# EAGLE board ProjectSchematic v36 (EAGLE 9.7.0)
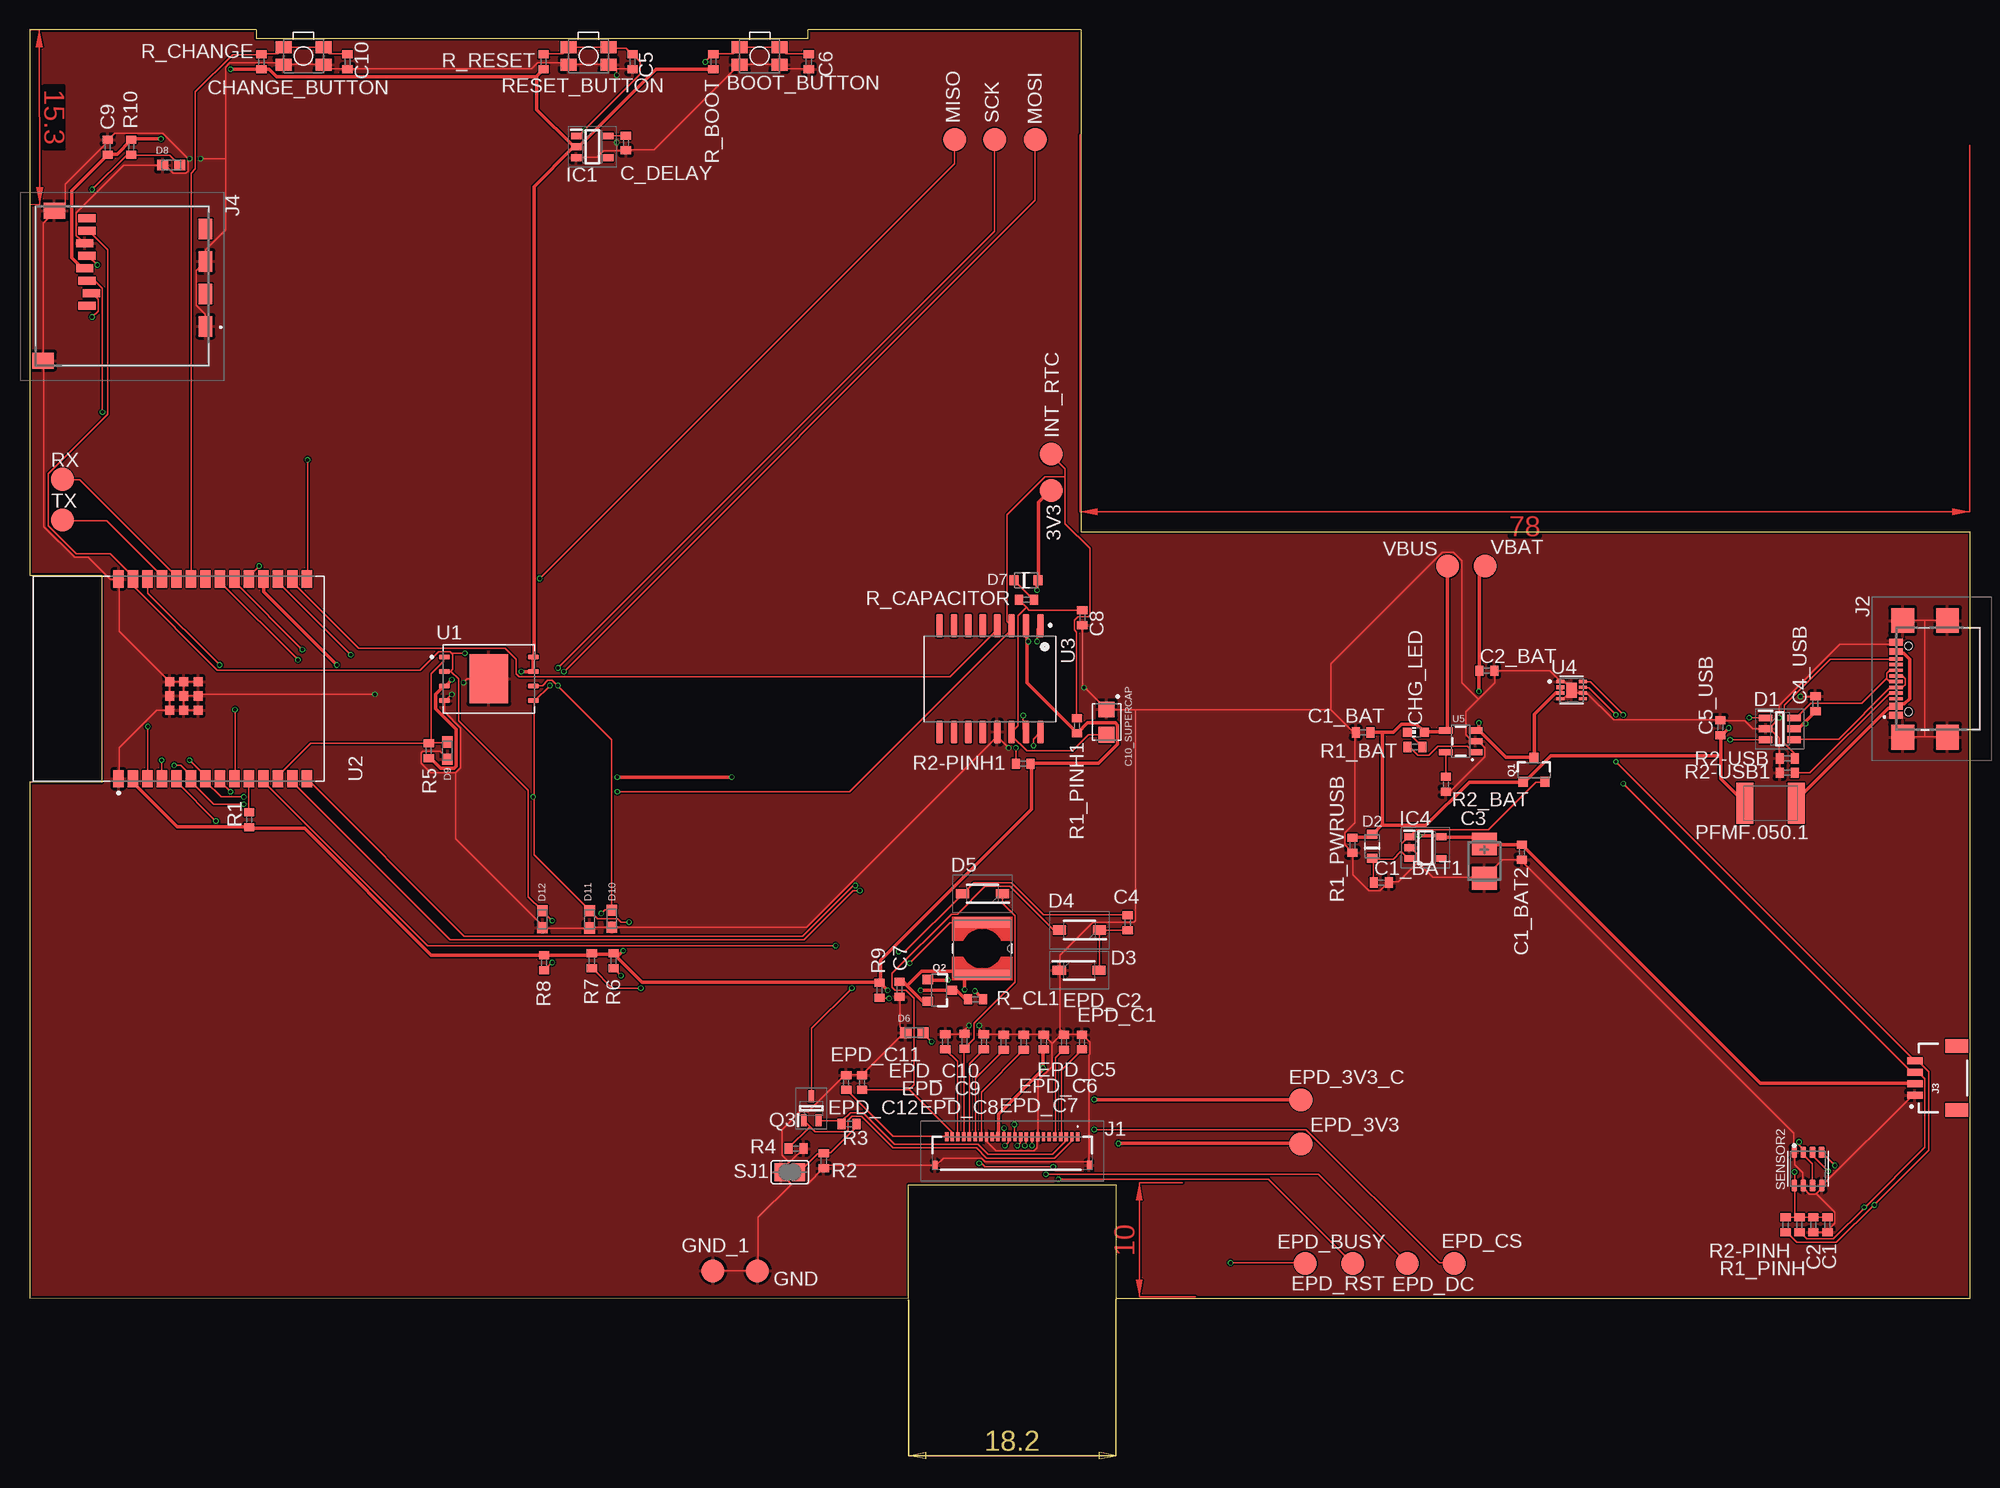
[diagram p0: board, top side]
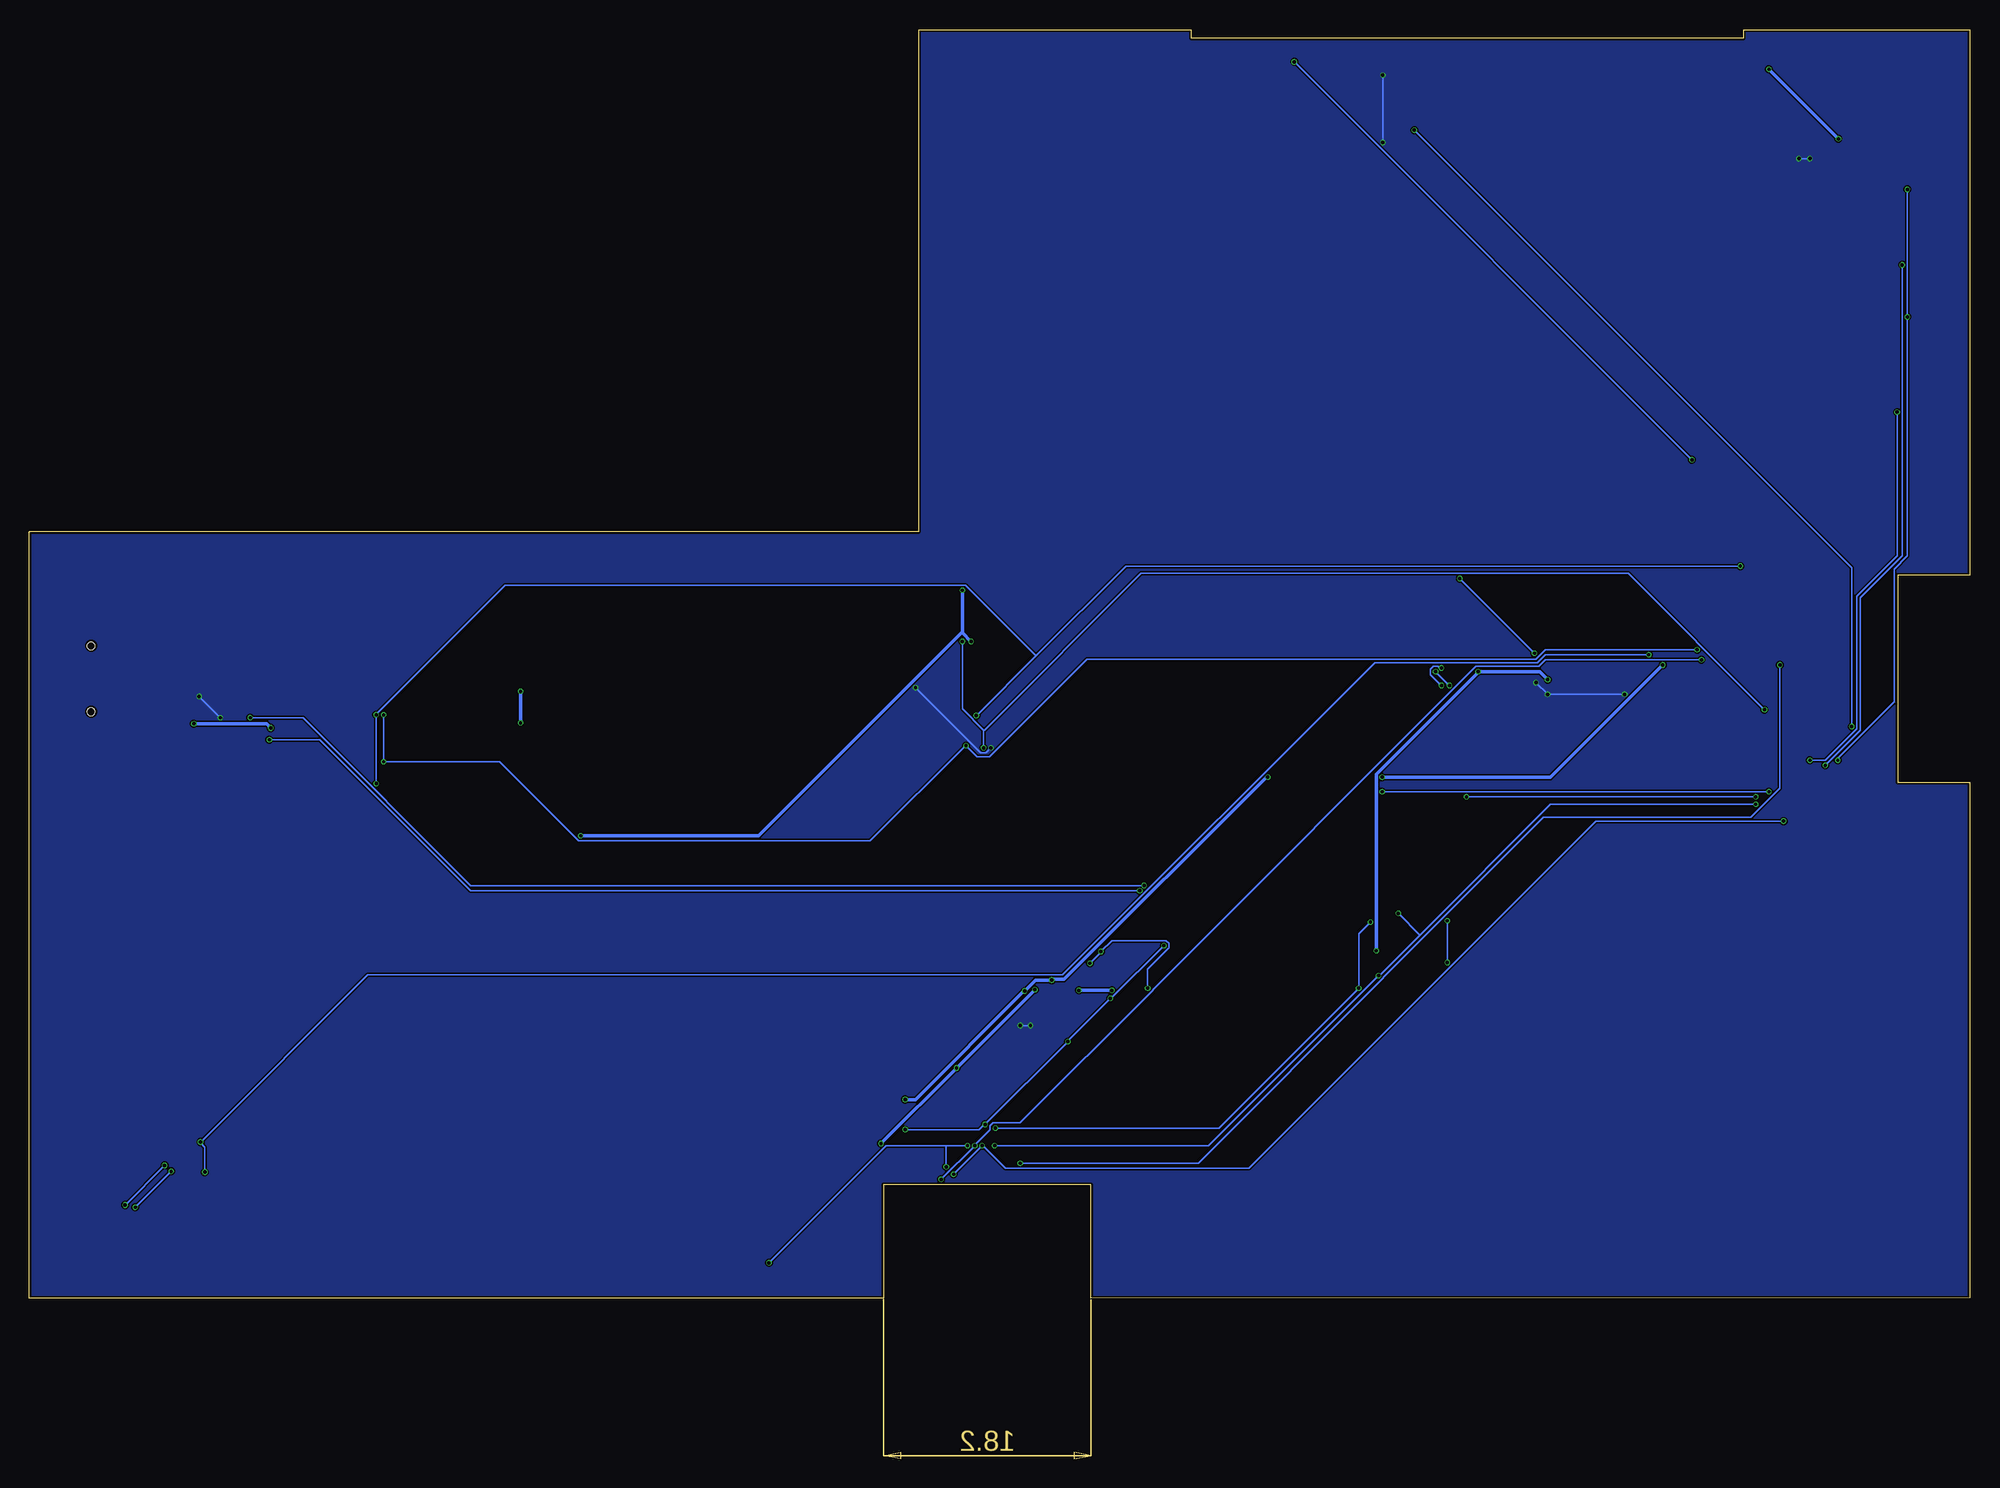
[diagram p1: board, bottom side, seen from below]

Size 170.21 x 111.21 mm. Coordinates in mm from the lower left corner, seen from the top.
Outline: 0,0.02 77.06,0.01 77.07,9.94 95.27,9.96 95.27,0.01 170.21,0 170.21,67.21 92.21,67.21 92.21,111.21 68.26,111.21 68.26,110.46 19.84,110.46 19.84,111.21 0.01,111.21 0.01,63.38 6.3,63.38 6.3,45.24 0.01,45.24 0,0.02
Copper layers (1*16): Top 0.035mm / dielectric 1.6mm / Bottom 0.035mm
Design rules "jlcpcb-2layers.dru": minimum track width 0.13mm, minimum drill 0.3mm, track to track 5mil, track to pad 5mil, pad to pad 5mil, via to via 5mil, smd to smd 5mil, copper to edge 0.2mm, drill to drill 6mil, minimum pad ring 10mil, minimum via ring 3mil, stop-mask expansion 4mil, vias tented up to drill 0mil, thermal gap 10mil
Net classes: 1 pow: width 0.3 mm; 2 rst: width 0.15 mm

## Footprints (pad centres in the part's own frame; a part is rotated, then mirrored left to right if it is on the bottom)
TP20R = smd 2 x 2: TP 0,0
MYBUTTON = smd 1.4 x 1.05: 1 1.75,0.75; 2 -1.75,0.75; 3 -1.75,-0.75; 4 1.75,-0.75
ESP32_WROVER_EAGLE-LTSPICE_C0402 = smd 0.7 x 0.9: 1 -0.65,0; 2 0.65,0
RCL_CT3528 = smd 2 x 2.2: + -1.5,0; - 1.5,0
CAPCP3225X100N = smd 1.4 x 1.4: 1 -1.1,0; 2 1.1,0
ADAFRUIT_CHIP-LED0603 = smd 0.8 x 0.8: A 0,-0.75; C 0,0.75
SOT95P280X145-6N = smd 1.2 x 0.6: 1 -1.25,0.95; 2 -1.25,0; 3 -1.25,-0.95; 4 1.25,-0.95; 5 1.25,0; 6 1.25,0.95
ESP32_WROVER_AVX---SD0805S020S1R0_AVX_SD0805S020S1R0_0 = smd 0.8 x 0.9: 1 -1.05,0; 2 1.05,0
SOD3716X135N = smd 1.15 x 0.8: 1 -1.75,0; 2 1.75,0
DIOC1608X36N = smd 0.97 x 0.94: 1 -0.75,0; 2 0.75,0
SOT95P280X125-5N = smd 0.9 x 0.6: 1 -1.4,0.95; 2 -1.4,0; 3 -1.4,-0.95; 4 1.4,-0.95; 5 1.4,0.95
SOT95P280X120-5N = smd 0.9 x 0.6: 1 -1.4,0.95; 2 -1.4,0; 3 -1.4,-0.95; 4 1.4,-0.95; 5 1.4,0.95
FH34SRJ24S05SH99 = smd 0.3 x 0.8: 1 5.75,1.45; 2 5.25,1.45; 3 4.75,1.45; 4 4.25,1.45; 5 3.75,1.45; 6 3.25,1.45; 7 2.75,1.45; 8 2.25,1.45; 9 1.75,1.45; 10 1.25,1.45; 11 0.75,1.45; 12 0.25,1.45; 13 -0.25,1.45; 14 -0.75,1.45; 15 -1.25,1.45; 16 -1.75,1.45; 17 -2.25,1.45; 18 -2.75,1.45; 19 -3.25,1.45; 20 -3.75,1.45; 21 -4.25,1.45; 22 -4.75,1.45; 23 -5.25,1.45; 24 -5.75,1.45 | smd 0.4 x 0.8: MP1 6.75,-1.05; MP2 -6.75,-1.05
SAMACSYS_PARTS_USB4110GFA = smd 0.3 x 1.15: A1 -3.35,3.678; A4 -2.55,3.678; A5 -1.25,3.678; A6 -0.25,3.678; A7 0.25,3.678; A8 1.25,3.678; A9 2.55,3.678; A12 3.35,3.678; B1 3.05,3.678; B4 2.25,3.678; B5 1.75,3.678; B6 0.75,3.678; B7 -0.75,3.678; B8 -1.75,3.678; B9 -2.25,3.678; B12 -3.05,3.678 | smd 2.18 x 2: MP1 -5.11,-0.827; MP2 5.11,-0.827; MP3 -5.11,3.103; MP4 5.11,3.103 | hole 0.65: -2.89,2.603; 2.89,2.603
JST04_1MM_RA = smd 0.6 x 1.35: 1 -1.5,0; 2 -0.5,0; 3 0.5,0; 4 1.5,0 | smd 1.2 x 2: NC1 2.8,-3.675; NC2 -2.8,-3.675
112ATAARR03ATTEND = smd 1.8 x 1.2: G1 10.6,10.4; G2 4.9,10.4; S1 7.75,10.4; S2 2.05,10.4 | smd 1.4 x 1.9: G3 13.6,-3.85; G4 0.45,-2.85 | smd 0.7 x 1.5: P1 8.8,0; P2 7.7,0.4; P3 6.6,0; P4 5.5,-0.2; P5 4.4,0; P6 3.3,-0.2; P7 2.2,0; P8 1.1,0
IND_4828-WE-TPC_WRE = smd 0.889 x 4.826: 1 -2.286,0; 2 2.286,0
ESP32C6_VARISTOR_CT/CN1812 = smd 1.5 x 3.6: 1 -2.25,0; 2 2.25,0
ESP32_WROVER_SPARKFUN-DISCRETESEMI_SOT23-3 = smd 0.8 x 0.9: 1 -0.95,-1; 2 0.95,-1; 3 0,1.1
SOT65P210X110-3N = smd 1.05 x 0.5: 1 -1.05,0.65; 2 -1.05,-0.65; 3 1.05,0
ESP32_WROVER_EAGLE-LTSPICE_R0402 = smd 0.7 x 0.9: 1 -0.65,0; 2 0.65,0
ESP32_WROVER_BME680_PSON80P300X300X100-8N = smd 1.016 x 0.5: 1 1.458,1.2; 2 1.458,0.4; 3 1.458,-0.4; 4 1.458,-1.2; 5 -1.458,-1.22; 6 -1.458,-0.4; 7 -1.458,0.4; 8 -1.458,1.2
SJ = smd 1.168 x 1.6: 1 -0.762,0; 2 0.762,0
SON127P600X800X80-9N = smd 0.94 x 0.44: 1 -3.895,1.905; 2 -3.895,0.635; 3 -3.895,-0.635; 4 -3.895,-1.905; 5 3.895,-1.905; 6 3.895,-0.635; 7 3.895,0.635; 8 3.895,1.905 | smd 3.4 x 4.3: 9 0,0
XCVR_ESP32-C6-WROOM-1-N8 = smd 1.5 x 0.9: 1 -8.75,5.26; 2 -8.75,3.99; 3 -8.75,2.72; 4 -8.75,1.45; 5 -8.75,0.18; 6 -8.75,-1.09; 7 -8.75,-2.36; 8 -8.75,-3.63; 9 -8.75,-4.9; 10 -8.75,-6.17; 11 -8.75,-7.44; 12 -8.75,-8.71; 13 -8.75,-9.98; 14 -8.75,-11.25; 15 8.75,-11.25; 16 8.75,-9.98; 17 8.75,-8.71; 18 8.75,-7.44; 19 8.75,-6.17; 20 8.75,-4.9; 21 8.75,-3.63; 22 8.75,-2.36; 23 8.75,-1.09; 24 8.75,0.18; 25 8.75,1.45; 26 8.75,2.72; 27 8.75,3.99; 28 8.75,5.26 | smd 0.8 x 0.8: 29_1 -2.755,0.79; 29_2 -1.505,0.79; 29_3 -0.255,0.79; 29_4 -2.755,-0.46; 29_5 -1.505,-0.46; 29_6 -0.255,-0.46; 29_7 -2.755,-1.71; 29_8 -1.505,-1.71; 29_9 -0.255,-1.71
SOIC127P1032X265-16N = smd 2.05 x 0.59: 1 -4.655,4.445; 2 -4.655,3.175; 3 -4.655,1.905; 4 -4.655,0.635; 5 -4.655,-0.635; 6 -4.655,-1.905; 7 -4.655,-3.175; 8 -4.655,-4.445; 9 4.655,-4.445; 10 4.655,-3.175; 11 4.655,-1.905; 12 4.655,-0.635; 13 4.655,0.635; 14 4.655,1.905; 15 4.655,3.175; 16 4.655,4.445
SON50P200X200X80-9N = smd 0.76 x 0.27: 1 -0.985,0.75; 4 -0.985,-0.75; 5 0.985,-0.75; 6 0.985,-0.25; 7 0.985,0.25; 8 0.985,0.75 | smd 0.76 x 0.3: 2 -0.985,0.25; 3 -0.985,-0.25 | smd 0.9 x 1.3: 9 0,0
ESP32_WROVER_SPARKFUN-IC-POWER_SOT23-5 = smd 0.55 x 1.2: 1 -0.95,-1.3; 2 0,-1.3; 3 0.95,-1.3; 4 0.95,1.3; 5 -0.95,1.3

## Placement (x,y rotation side)
3V3  TPTP20R  [TP20R]  89.57,70.82 0 top
BOOT_BUTTON  BUTTON_CUSYOMV1  [MYBUTTON]  64.01,108.92 180 top
C1  100nF  [ESP32_WROVER_EAGLE-LTSPICE_C0402]  157.67,6.43 270 top
C1_BAT  4.7uF  [ESP32_WROVER_EAGLE-LTSPICE_C0402]  116.95,49.61 180 top
C1_BAT1  4.7uF  [ESP32_WROVER_EAGLE-LTSPICE_C0402]  118.54,36.44 0 top
C1_BAT2  4.7uF  [ESP32_WROVER_EAGLE-LTSPICE_C0402]  130.86,39.1 270 top
C2  100nF  [ESP32_WROVER_EAGLE-LTSPICE_C0402]  156.43,6.43 270 top
C2_BAT  4.7uF  [ESP32_WROVER_EAGLE-LTSPICE_C0402]  127.8,55.02 0 top
C3  100uF TANT  [RCL_CT3528]  127.58,38.33 270 top
C4  4.7uF/25V  [ESP32_WROVER_EAGLE-LTSPICE_C0402]  96.3,32.91 90 top
C4_USB  100nF  [ESP32_WROVER_EAGLE-LTSPICE_C0402]  156.62,52.12 90 top
C5  1uF  [ESP32_WROVER_EAGLE-LTSPICE_C0402]  52.87,108.42 270 top
C5_USB  4.7uF  [ESP32_WROVER_EAGLE-LTSPICE_C0402]  148.28,50.03 90 top
C6  100nF  [ESP32_WROVER_EAGLE-LTSPICE_C0402]  68.33,108.42 270 top
C7  10uF  [ESP32_WROVER_EAGLE-LTSPICE_C0402]  76.29,27.08 270 top
C8  100nF  [ESP32_WROVER_EAGLE-LTSPICE_C0402]  92.32,59.67 270 top
C9  100nF  [ESP32_WROVER_EAGLE-LTSPICE_C0402]  6.84,100.93 90 top
C10  100nF  [ESP32_WROVER_EAGLE-LTSPICE_C0402]  27.87,108.42 270 top
C10_SUPERCAP  CPH3225A  [CAPCP3225X100N]  94.44,50.52 270 top
C_DELAY  100nF  [ESP32_WROVER_EAGLE-LTSPICE_C0402]  52.29,101.29 270 top
CHANGE_BUTTON  BUTTON_CUSYOMV1  [MYBUTTON]  24.01,108.92 180 top
CHG_LED  [ADAFRUIT_CHIP-LED0603]  121.57,49.63 90 top
D1  USBLC6-2SC6Y  [SOT95P280X145-6N]  153.5,49.93 0 top
D2  ESP32_WROVER_AVX---SD0805S020S1R0_AVX_SD0805S020S1R0_0_0AVX_SD0805S020S1R0_0_0  [ESP32_WROVER_AVX---SD0805S020S1R0_AVX_SD0805S020S1R0_0]  117.74,39.62 90 top
D3  MBR0530  [SOD3716X135N]  92.04,28.74 0 top
D4  MBR0530  [SOD3716X135N]  92.07,32.28 180 top
D5  MBR0530  [SOD3716X135N]  83.57,35.46 180 top
D6  PGB1010603MR  [DIOC1608X36N]  77.58,23.28 0 top
D7  ESP32_WROVER_AVX---SD0805S020S1R0_AVX_SD0805S020S1R0_0_0AVX_SD0805S020S1R0_0_0  [ESP32_WROVER_AVX---SD0805S020S1R0_AVX_SD0805S020S1R0_0]  87.38,62.95 0 top
D8  PGB1010603MR  [DIOC1608X36N]  12.4,99.36 0 top
D9  PGB1010603MR  [DIOC1608X36N]  36.64,48.02 90 top
D10  PGB1010603MR  [DIOC1608X36N]  51.06,33.26 90 top
D11  PGB1010603MR  [DIOC1608X36N]  49.1,33.21 90 top
D12  PGB1010603MR  [DIOC1608X36N]  44.96,33.22 90 top
EPD_3V3  TPTP20R  [TP20R]  111.49,13.53 0 top
EPD_3V3_C  TPTP20R  [TP20R]  111.49,17.38 0 top
EPD_BUSY  TPTP20R  [TP20R]  111.87,3.06 0 top
EPD_C1  1uF/50V  [ESP32_WROVER_EAGLE-LTSPICE_C0402]  92.28,22.47 90 top
EPD_C2  1uF/50V  [ESP32_WROVER_EAGLE-LTSPICE_C0402]  90.71,22.45 90 top
EPD_C5  0.1uF/50V  [ESP32_WROVER_EAGLE-LTSPICE_C0402]  88.93,22.47 270 top
EPD_C6  1uF/50V  [ESP32_WROVER_EAGLE-LTSPICE_C0402]  87.18,22.44 270 top
EPD_C7  1uF/50V  [ESP32_WROVER_EAGLE-LTSPICE_C0402]  85.42,22.44 270 top
EPD_C8  1uF/50V  [ESP32_WROVER_EAGLE-LTSPICE_C0402]  83.68,22.49 270 top
EPD_C9  1uF/50V  [ESP32_WROVER_EAGLE-LTSPICE_C0402]  81.99,22.52 270 top
EPD_C10  1uF/50V  [ESP32_WROVER_EAGLE-LTSPICE_C0402]  80.3,22.49 270 top
EPD_C11  1uF/50V  [ESP32_WROVER_EAGLE-LTSPICE_C0402]  72.99,18.92 270 top
EPD_C12  1uF/50V  [ESP32_WROVER_EAGLE-LTSPICE_C0402]  71.61,18.92 270 top
EPD_CS  TPTP20R  [TP20R]  124.93,3.06 0 top
EPD_DC  TPTP20R  [TP20R]  120.82,3.06 0 top
EPD_RST  TPTP20R  [TP20R]  116.04,3.06 0 top
GND  TPTP20R  [TP20R]  63.83,2.39 0 top
GND_1  TPTP20R  [TP20R]  59.92,2.39 0 top
IC1  BD5229G-TR  [SOT95P280X125-5N]  49.34,100.96 0 top
IC4  XC6220A331MR-G  [SOT95P280X120-5N]  122.4,39.5 0 top
INT_RTC  TPTP20R  [TP20R]  89.57,74.02 0 top
J1  FH34SRJ-24S-0.5SH_99_  [FH34SRJ24S05SH99]  86.16,12.7 0 top
J2  SAMACSYS_PARTS_USB4110-GF-A  [SAMACSYS_PARTS_USB4110GFA]  167.37,54.31 90 top
J3  QWIIC_RIGHT_ANGLE  [JST04_1MM_RA]  165.33,19.31 90 top
J4  112A-TAAR-R03_ATTEND  [112ATAARR03ATTEND]  5.02,95.81 270 top
L1  68uH  [IND_4828-WE-TPC_WRE]  83.54,30.66 270 top
MISO  TPTP20R  [TP20R]  81.11,101.6 90 top
MOSI  TPTP20R  [TP20R]  88.19,101.6 90 top
PFMF.050.1  ESP32C6_VARISTORCN1812  [ESP32C6_VARISTOR_CT/CN1812]  152.68,43.4 180 top
Q1  20V/4.2A/52mΩ/1.4W  [ESP32_WROVER_SPARKFUN-DISCRETESEMI_SOT23-3]  131.93,46.29 0 top
Q2  20V/4.2A/52mΩ/1.4W  [ESP32_WROVER_SPARKFUN-DISCRETESEMI_SOT23-3]  79.76,27 270 top
Q3  SI1308EDL-T1-GE3  [SOT65P210X110-3N]  68.54,16.64 90 top
R1  10K  [ESP32_WROVER_EAGLE-LTSPICE_R0402]  19.25,41.96 90 top
R1_BAT  200  [ESP32_WROVER_EAGLE-LTSPICE_R0402]  121.49,48.33 0 top
R1_PINH  10K  [ESP32_WROVER_EAGLE-LTSPICE_R0402]  155.22,6.43 90 top
R1_PINH1  10K  [ESP32_WROVER_EAGLE-LTSPICE_R0402]  91.84,50.19 270 top
R1_PWRUSB  100K  [ESP32_WROVER_EAGLE-LTSPICE_R0402]  116,39.72 90 top
R2  2.2  [ESP32_WROVER_EAGLE-LTSPICE_R0402]  69.64,12.05 90 top
R2-PINH  10K  [ESP32_WROVER_EAGLE-LTSPICE_R0402]  154,6.43 90 top
R2-PINH1  10K  [ESP32_WROVER_EAGLE-LTSPICE_R0402]  87.14,46.87 0 top
R2-USB  5k1  [ESP32_WROVER_EAGLE-LTSPICE_R0402]  154.15,47.33 180 top
R2-USB1  5K1  [ESP32_WROVER_EAGLE-LTSPICE_R0402]  154.14,46.07 0 top
R2_BAT  2K  [ESP32_WROVER_EAGLE-LTSPICE_R0402]  124.2,45.06 90 top
R3  0.47  [ESP32_WROVER_EAGLE-LTSPICE_R0402]  71.87,15.27 0 top
R4  10K  [ESP32_WROVER_EAGLE-LTSPICE_R0402]  67.21,13.12 0 top
R5  10K  [ESP32_WROVER_EAGLE-LTSPICE_R0402]  35,48.01 270 top
R6  10K  [ESP32_WROVER_EAGLE-LTSPICE_R0402]  51.2,29.59 90 top
R7  10K  [ESP32_WROVER_EAGLE-LTSPICE_R0402]  49.3,29.59 90 top
R8  10K  [ESP32_WROVER_EAGLE-LTSPICE_R0402]  45.12,29.41 90 top
R9  10K  [ESP32_WROVER_EAGLE-LTSPICE_R0402]  74.54,27 90 top
R10  10K  [ESP32_WROVER_EAGLE-LTSPICE_R0402]  8.89,100.93 90 top
R_BOOT  10K  [ESP32_WROVER_EAGLE-LTSPICE_R0402]  59.96,108.42 90 top
R_CAPACITOR  15  [ESP32_WROVER_EAGLE-LTSPICE_R0402]  87.42,61.24 0 top
R_CHANGE  10K  [ESP32_WROVER_EAGLE-LTSPICE_R0402]  20.32,108.42 90 top
R_CL1  10K  [ESP32_WROVER_EAGLE-LTSPICE_R0402]  82.95,26.22 0 top
R_RESET  10K  [ESP32_WROVER_EAGLE-LTSPICE_R0402]  45.06,108.42 90 top
RESET_BUTTON  BUTTON_CUSYOMV1  [MYBUTTON]  49.01,108.92 180 top
RX  TPTP20R  [TP20R]  2.86,71.81 0 top
SCK  TPTP20R  [TP20R]  84.63,101.6 90 top
SENSOR2  BME688  [ESP32_WROVER_BME680_PSON80P300X300X100-8N]  155.96,11.34 90 top
SJ1  [SJ]  66.67,11.05 0 top
TX  TPTP20R  [TP20R]  2.86,68.22 0 top
U1  W25Q512JVEIQ  [SON127P600X800X80-9N]  40.26,54.31 0 top
U2  ESP32-C6-WROOM-1-N8  [XCVR_ESP32-C6-WROOM-1-N8]  13.05,54.31 90 top
U3  DS3231SN#  [SOIC127P1032X265-16N]  84.22,54.31 270 top
U4  MAX17048G+T10  [SON50P200X200X80-9N]  135.23,53.32 0 top
U5  MCP73831  [ESP32_WROVER_SPARKFUN-IC-POWER_SOT23-5]  125.5,48.83 90 top
VBAT  TPTP20R  [TP20R]  127.64,64.2 0 top
VBUS  TPTP20R  [TP20R]  124.37,64.19 0 top

## Library data of the parts
3V3 BOOT_BUTTON CHANGE_BUTTON CHG_LED EPD_3V3 EPD_3V3_C EPD_BUSY EPD_CS EPD_DC EPD_RST GND GND_1 INT_RTC MISO MOSI PFMF.050.1 RESET_BUTTON RX SCK SJ1 TX VBAT VBUS = ProjectLib
C1 C1_BAT C1_BAT1 C1_BAT2 C2 C2_BAT C4 C4_USB C5 C5_USB C6-C10 C_DELAY EPD_C1 EPD_C2 EPD_C5-EPD_C12 = ProjectLib; SPICEMODEL: NONE; SPICEPREFIX: C
C3 = ProjectLib; SPICEPREFIX: C
C10_SUPERCAP = ProjectLib; AVAILABILITY: Not in stock; CHECK_PRICES: https://www.snapeda.com/parts/CPH3225A/Seiko+Instruments/view-part/?ref=eda; DESCRIPTION: 11 mF (EDLC) Supercapacitor 3.3 V 1210 (3225 Metric) - -; MF: Seiko Instruments; MP: CPH3225A; PACKAGE: 1210 Seiko; PRICE: None; PURCHASE-URL: https://www.snapeda.com/api/url_track_click_mouser/?unipart_id=562593&manufacturer=Seiko Instruments&part_name=CPH3225A&search_term=None; SNAPEDA_LINK: https://www.snapeda.com/parts/CPH3225A/Seiko+Instruments/view-part/?ref=snap
D1 = ProjectLib; AVAILABILITY: In Stock; CHECK_PRICES: https://www.snapeda.com/parts/USBLC6-2SC6Y/STMicroelectronics/view-part/?ref=eda; DESCRIPTION: 17V Clamp 5A (8/20µs) Ipp Tvs Diode Surface Mount SOT-23-6; MF: STMicroelectronics; MP: USBLC6-2SC6Y; PACKAGE: SOT-23-6 STMicroelectronics; PRICE: None; SNAPEDA_LINK: https://www.snapeda.com/parts/USBLC6-2SC6Y/STMicroelectronics/view-part/?ref=snap
D2 D7 = ProjectLib; CENTROID_NOT_SPECIFIED: No; DATASHEET: http://datasheets.avx.com/schottky.pdf; DIGIKEY_DESCRIPTION: DIODE SCHOTTKY 20V 1A 0805; DIGIKEY_PART_NUMBER: 478-7800-1-ND; LEAD_FREE: yes; MF: AVX; MOUSER_PART_NUMBER: 581-SD0805S020S1R0; PACKAGE: 0805 (2012 metric); PREFIX: D; ROHS: yes; TEMPERATURE_RANGE_HIGH: +125°C; TEMPERATURE_RANGE_LOW: -55°C
D3-D5 = ProjectLib; AVAILABILITY: In Stock; CHECK_PRICES: https://www.snapeda.com/parts/MBR0530/Onsemi/view-part/?ref=eda; DESCRIPTION: Diode Schottky 30 V 500mA Surface Mount SOD-123; MF: ON Semiconductor; MP: MBR0530; PACKAGE: SOD-123-2 ON Semiconductor; PRICE: None; PURCHASE-URL: https://www.snapeda.com/api/url_track_click_mouser/?unipart_id=179458&manufacturer=ON Semiconductor&part_name=MBR0530&search_term=None; SNAPEDA_LINK: https://www.snapeda.com/parts/MBR0530/Onsemi/view-part/?ref=snap
D6 D8-D12 = ProjectLib; AVAILABILITY: In Stock; CHECK_PRICES: https://www.snapeda.com/parts/PGB1010603MR/Littelfuse/view-part/?ref=eda; DESCRIPTION: 150V (Typ) Clamp - Ipp Tvs Diode Surface Mount 0603 (1608 Metric); MF: Littelfuse Inc.; MP: PGB1010603MR; PACKAGE: 0603 Littelfuse Inc.; PRICE: None; PURCHASE-URL: https://www.snapeda.com/api/url_track_click_mouser/?unipart_id=5659453&manufacturer=Littelfuse Inc.&part_name=PGB1010603MR&search_term=None; SNAPEDA_LINK: https://www.snapeda.com/parts/PGB1010603MR/Littelfuse/view-part/?ref=snap
IC1 = ProjectLib; DESCRIPTION: Voltage Detector with Adjustable Delay Time: CMOS processes are utilized to develop high precision, low current consumption CMOS reset ICs that allow arbitrary setting of the delay time. The extensive lineup includes both Nch Open Drain and CMOS output types in a wide range of detection voltages (from 2.3V to 6.0V, in 0.1V steps), enabling selection of the ideal solution based on customer requirements. In addition, the entire series is of course both lead-free and RoHS-compliant.; HEIGHT: 1.25mm; MANUFACTURER_NAME: ROHM Semiconductor; MANUFACTURER_PART_NUMBER: BD5229G-TR; MOUSER_PART_NUMBER: 755-BD5229G-TR; MOUSER_PRICE-STOCK: https://www.mouser.co.uk/ProductDetail/ROHM-Semiconductor/BD5229G-TR?qs=4kLU8WoGk0vvnhrrYwdszw%3D%3D
IC4 = ProjectLib; DESCRIPTION: LDO Voltage Regulators; HEIGHT: 1.2mm; MANUFACTURER_NAME: Torex; MANUFACTURER_PART_NUMBER: XC6220A331MR-G; MOUSER_PART_NUMBER: 865-XC6220A331MR-G; MOUSER_PRICE-STOCK: https://www.mouser.co.uk/ProductDetail/Torex-Semiconductor/XC6220A331MR-G?qs=AsjdqWjXhJ8ZSWznL1J0gg%3D%3D
J1 = ProjectLib; DESCRIPTION: 24 Position FFC, FPC Connector Contacts, Top and Bottom 0.020" (0.50mm) Surface Mount, Right Angle; HEIGHT: 1.1mm; MANUFACTURER_NAME: Hirose; MANUFACTURER_PART_NUMBER: FH34SRJ-24S-0.5SH(99); MOUSER_PART_NUMBER: 798-FH34SRJ24S05SH99; MOUSER_PRICE-STOCK: https://www.mouser.co.uk/ProductDetail/Hirose-Connector/FH34SRJ-24S-0.5SH99?qs=vcbW%252B4%252BSTIpKBl5ap9J8Fw%3D%3D
J2 = ProjectLib; DESCRIPTION: CONN USB 2.0 TYPE-C R/A SMT; HEIGHT: 3.26mm; MANUFACTURER_NAME: GCT (GLOBAL CONNECTOR TECHNOLOGY); MANUFACTURER_PART_NUMBER: USB4110-GF-A; MOUSER_PART_NUMBER: 640-USB4110-GF-A; MOUSER_PRICE-STOCK: https://www.mouser.co.uk/ProductDetail/GCT/USB4110-GF-A?qs=KUoIvG%2F9IlYiZvIXQjyJeA%3D%3D
J3 = ProjectLib; PROD_ID: CONN-13694
J4 = ProjectLib; DESCRIPTION: Micro SD Card Socket, Push-Push Type, Top Mount, SMT, H=1.83mm, 10u; HEIGHT: 1.9mm; MANUFACTURER_NAME: ATTEND; MANUFACTURER_PART_NUMBER: 112A-TAAR-R03 ATTEND
L1 = ProjectLib; COPYRIGHT: Copyright (C) 2024 Ultra Librarian. All rights reserved.; MANUFACTURER_PART_NUMBER: 744043680; MFR_NAME: Wurth Electronics
Q1 Q2 = ProjectLib; PROD_ID: TRAN-14388
Q3 = ProjectLib; AVAILABILITY: In Stock; CHECK_PRICES: https://www.snapeda.com/parts/SI1308EDL-T1-GE3/Vishay+Siliconix/view-part/?ref=eda; DESCRIPTION: Si1308EDL-T1-GE3 N-channel MOSFET Transistor, 1.5 A, 30 V, 3-Pin SC-70 | Siliconix / Vishay SI1308EDL-T1-GE3; MF: Vishay Siliconix; MP: SI1308EDL-T1-GE3; PACKAGE: SOT-323 Vishay Semiconductor; PRICE: None; PURCHASE-URL: https://www.snapeda.com/api/url_track_click_mouser/?unipart_id=274603&manufacturer=Vishay Siliconix&part_name=SI1308EDL-T1-GE3&search_term=None; SNAPEDA_LINK: https://www.snapeda.com/parts/SI1308EDL-T1-GE3/Vishay+Siliconix/view-part/?ref=snap
R1 R1_BAT R1_PINH R1_PINH1 R1_PWRUSB R2 R2-PINH R2-PINH1 R2-USB R2-USB1 R2_BAT R3-R10 R_BOOT R_CAPACITOR R_CHANGE R_CL1 R_RESET = ProjectLib; SPICEMODEL: NONE; SPICEPREFIX: R
SENSOR2 = ProjectLib; AVAILABILITY: Unavailable; DESCRIPTION: Integrated Environmental Unit; MF: Bosch Sensortec; MP: BME680; PACKAGE: LGA-8 Bosch Tools; PRICE: None
U1 = ProjectLib; AVAILABILITY: In Stock; CHECK_PRICES: https://www.snapeda.com/parts/W25Q512JVEIQ/Winbond+Electronics/view-part/?ref=eda; DESCRIPTION: FLASH - NOR Memory IC 512Mb (64M x 8) SPI - Quad I/O 133 MHz 8-WSON (8x6); MF: Winbond Electronics; MP: W25Q512JVEIQ; PACKAGE: Package; PRICE: None; SNAPEDA_LINK: https://www.snapeda.com/parts/W25Q512JVEIQ/Winbond+Electronics/view-part/?ref=snap
U2 = ProjectLib; AVAILABILITY: In Stock; CHECK_PRICES: https://www.snapeda.com/parts/ESP32-C6-WROOM-1-N8/Espressif+Systems/view-part/?ref=eda; DESCRIPTION: Multiprotocol Modules ESP32-C6 module, Wi-Fi 6 in 2.4 GHz band, Bluetooth 5, Zigbee 3.0 and Thread. ESP34-WROOM Compatible - ENGINEERING SAMPLE; MF: Espressif Systems; MP: ESP32-C6-WROOM-1-N8; PACKAGE: None; PRICE: None; SNAPEDA_LINK: https://www.snapeda.com/parts/ESP32-C6-WROOM-1-N8/Espressif+Systems/view-part/?ref=snap
U3 = ProjectLib; AVAILABILITY: In Stock; CHECK_PRICES: https://www.snapeda.com/parts/DS3231SN%23/Analog+Devices/view-part/?ref=eda; DESCRIPTION: Extremely Accurate I²C-Integrated RTC/TCXO/Crystal; MF: Analog Devices; MP: DS3231SN#; PACKAGE: SOIC-16 Maxim; PRICE: None; PURCHASE-URL: https://www.snapeda.com/api/url_track_click_mouser/?unipart_id=99048&manufacturer=Analog Devices&part_name=DS3231SN#&search_term=None; SNAPEDA_LINK: https://www.snapeda.com/parts/DS3231SN%23/Analog+Devices/view-part/?ref=snap
U4 = ProjectLib; AVAILABILITY: In Stock; CHECK_PRICES: https://www.snapeda.com/parts/MAX17048G+T10/Analog+Devices/view-part/?ref=eda; DESCRIPTION: 3µA 1-Cell/2-Cell Fuel Gauge with ModelGauge; MF: Analog Devices; MP: MAX17048G+T10; PACKAGE: TDFN-8 Maxim; PRICE: None; PURCHASE-URL: https://www.snapeda.com/api/url_track_click_mouser/?unipart_id=329239&manufacturer=Analog Devices&part_name=MAX17048G+T10&search_term=None; SNAPEDA_LINK: https://www.snapeda.com/parts/MAX17048G+T10/Analog+Devices/view-part/?ref=snap
U5 = ProjectLib; PROD_ID: IC-09995

## Nets
3V3 [pow]: 3V3.TP C1_BAT2.1 C3.+ C9.1 D7.2 IC1.2 IC4.5 J3.2 J4.P4 Q2.3 R1.1 R1_PINH1.2 R2-PINH1.2 R5.2 R6.2 R7.2 R8.2 R9.2 R10.2 R_BOOT.1 R_CHANGE.1 R_CL1.1 R_RESET.1 U1.3 U1.7 U1.8 U2.2 U3.2
32KHZ [rst]: R2-PINH1.1 U2.9 U3.1
DN [rst]: D1.4 J2.A7 J2.B7
DP [rst]: D1.6 J2.A6 J2.B6
EPD_3V3 [pow]: C7.1 EPD_3V3.TP EPD_C5.2 J1.15 J1.16 L1.2 Q2.2
EPD_3V3_C [pow]: EPD_3V3_C.TP Q2.1 R_CL1.2 U2.18
EPD_BUSY [rst]: EPD_BUSY.TP J1.9 U2.26
EPD_CS [rst]: D6.2 EPD_CS.TP J1.12 R9.1 U2.11
EPD_DC [rst]: EPD_DC.TP J1.11 U2.5
EPD_RST [rst]: EPD_RST.TP J1.10 U2.21
FLASH_CS [rst]: D9.2 R5.1 U1.1 U2.12
GDR [rst]: J1.2 Q3.1 R4.1
GND [rst]: BOOT_BUTTON.1 BOOT_BUTTON.2 C1.2 C1_BAT1.2 C1_BAT2.2 C1_BAT.2 C2.2 C2_BAT.2 C3.- C4_USB.2 C5.2 C5_USB.2 C6.2 C7.2 C8.2 C9.2 C10.2 C10_SUPERCAP.1 C_DELAY.2 CHANGE_BUTTON.1 CHANGE_BUTTON.2 D1.2 D3.1 D6.1 D8.1 D9.1 D10.1 D11.1 D12.1 EPD_C1.2 EPD_C2.2 EPD_C5.1 EPD_C6.1 EPD_C7.1 EPD_C8.1 EPD_C9.1 EPD_C10.1 EPD_C11.1 EPD_C12.1 GND.TP GND_1.TP IC1.3 IC4.2 J1.8 J1.17 J1.MP1 J1.MP2 J2.A1 J2.A12 J2.B1 J2.B12 J2.MP1 J2.MP2 J2.MP3 J2.MP4 J3.1 J4.G1 J4.G2 J4.G3 J4.G4 J4.P6 R1_PWRUSB.1 R2-USB1.1 R2-USB.2 R2.1 R2_BAT.1 R4.2 RESET_BUTTON.1 RESET_BUTTON.2 SENSOR2.1 SENSOR2.5 SENSOR2.7 SJ1.1 U1.4 U1.9 U2.1 U2.28 U2.29_1 U2.29_2 U2.29_3 U2.29_4 U2.29_5 U2.29_6 U2.29_7 U2.29_8 U2.29_9 U3.13 U4.1 U4.4 U4.6 U4.9 U5.2
GPIO8 [rst]: R1.2 U2.10
I2C_PW [rst]: C1.1 C2.1 R1_PINH.2 R2-PINH.2 SENSOR2.2 SENSOR2.6 SENSOR2.8 U2.17
INT_RTC [rst]: INT_RTC.TP R1_PINH1.1 U2.8 U3.3
IO/BOOT [rst]: BOOT_BUTTON.3 BOOT_BUTTON.4 C6.1 R_BOOT.2 U2.15
IO/CHANGE [rst]: C10.1 CHANGE_BUTTON.3 CHANGE_BUTTON.4 R_CHANGE.2 U2.23
MISO [rst]: D12.2 J4.P7 MISO.TP R8.1 U1.2 U2.27
MOSI [rst]: D11.2 J1.14 J4.P3 MOSI.TP R7.1 U1.5 U2.7
N$1 [rst]: J2.B5 R2-USB.1
N$2 [rst]: J2.A5 R2-USB1.2
N$3 [rst]: C1_BAT1.1 D2.1 IC4.1 IC4.3 Q1.2
N$4 [rst]: C4.1 D3.2 D4.1
N$5 [rst]: CHG_LED.C R1_BAT.2
N$6 [rst]: R1_BAT.1 U5.1
N$7 [rst]: EPD_C10.2 J1.22
N$8 [rst]: R2_BAT.2 U5.5
N$9 [rst]: C_DELAY.1 IC1.5
N$10 [rst]: EPD_C1.1 J1.4
N$11 [rst]: EPD_C2.1 J1.5
N$12 [rst]: D7.1 R_CAPACITOR.2
N$19 [rst]: EPD_C6.2 J1.18
N$20 [rst]: EPD_C7.2 J1.19
N$21 [rst]: EPD_C8.2 J1.20
N$25 [rst]: EPD_C12.2 J1.24
PREVGH [rst]: D5.1 EPD_C9.2 J1.21
PREVGL [rst]: D4.2 EPD_C11.2 J1.23
RESE [rst]: J1.3 Q3.2 R3.1
RESE' [rst]: R2.2 R3.2 SJ1.2
RESET [rst]: C5.1 IC1.1 R_RESET.2 RESET_BUTTON.3 RESET_BUTTON.4 U2.3
RTC_RST [rst]: U2.16 U3.4
RX [rst]: RX.TP U2.24
SCK [rst]: D10.2 J1.13 J4.P5 R6.1 SCK.TP U1.6 U2.6
SCL [rst]: J3.4 R2-PINH.1 SENSOR2.4 U2.20 U3.16 U4.7
SDA [rst]: J3.3 R1_PINH.1 SENSOR2.3 U2.19 U3.15 U4.8
SRC [rst]: C4.2 D5.2 L1.1 Q3.3
SS_SD [rst]: D8.2 J4.P2 R10.1 U2.4
TX [rst]: TX.TP U2.25
USB_D+ [rst]: D1.1 U2.14
USB_D- [rst]: D1.3 U2.13
VBAT [pow]: C2_BAT.1 Q1.3 U4.2 U4.3 U5.3 VBAT.TP
VBUS [pow]: C1_BAT.1 C4_USB.1 C5_USB.1 CHG_LED.A D1.5 D2.2 PFMF.050.1.2 Q1.1 R1_PWRUSB.2 U5.4 VBUS.TP
VRTC [rst]: C8.1 C10_SUPERCAP.2 R_CAPACITOR.1 U3.14
VUSB [pow]: J2.A4 J2.A9 J2.B4 J2.B9 PFMF.050.1.1

## Tracks (layer width: path | path; a pad name or v marks a point on that pad's centre or on a via)
3V3  (via drill 0.3)
  Top 0.3: J4.P4 4.76,90.34 4.57,90.34 3.67,91.25 3.67,97.09 6.76,100.18 C9.1 6.88,100.3 7.66,100.3 8.88,101.53 R10.2 9,101.65 v11.51,101.65 | 44.41,107.12 21.66,107.12 21.02,107.76 20.38,107.76 R_CHANGE.1 20.18,107.76 v17.62,107.76 | 44.41,107.12 45.05,107.76 R_RESET.1 | IC1.2 47.88,101.01 47.68,101.01 44.47,104.22 44.47,106.99 44.41,107.12 | R_BOOT.1 59.95,107.76 54.94,107.76 48.07,100.88 IC1.2 | J3.2 165.32,18.84 151.77,18.84 130.95,39.65 C1_BAT2.1 130.82,39.78 127.68,39.78 C3.+ 127.55,39.84 126.97,40.42 123.82,40.42 IC4.5 123.69,40.55 v121.83,40.55 | 3V3.TP 89.51,70.81 88.48,69.79 88.48,62.98 D7.2 88.35,62.85 v88.35,62.08 | 87.45,57.58 87.45,53.98 91.76,49.67 R1_PINH1.2 91.89,49.55 92.79,50.45 95.23,50.45 95.42,50.25 95.42,48.58 93.75,46.91 87.84,46.91 R2-PINH1.2 87.84,46.72 87.84,42.86 74.6,29.63 74.6,27.83 R9.2 | 87.45,57.58 87.45,58.93 U3.2 | v87.58,57.58 87.45,57.58 | R5.2 35.03,47.3 35.22,47.3 36.05,46.46 37.21,46.46 37.4,46.66 37.4,49.87 35.6,51.67 35.6,52.95 36.31,53.66 U1.3 36.5,53.72 v37.02,54.24 | v43.12,54.94 44.02,54.94 U1.7 44.15,55.01 44.15,56.16 U1.8 44.21,56.36 44.21,97.48 47.62,100.88 IC1.2 | U2.2 9.07,45.5 9.07,45.18 12.92,41.32 19.22,41.32 R1.1 19.35,41.19 24.1,41.19 35.22,30.08 44.98,30.08 R8.2 45.18,30.08 49.16,30.08 49.29,30.21 R7.2 49.42,30.14 51.09,30.14 R6.2 | R_CL1.1 82.25,26.22 82.06,26.22 81.29,27 80.9,27 Q2.3 80.77,27 v78.14,27 | R9.2 74.54,27.7 53.72,27.7 51.22,30.21 R6.2 | v75.25,27 74.67,27.57 R9.2 | v52.05,30.46 51.6,30.02 R6.2
  Bottom 0.3: v17.62,107.76 v11.51,101.65 | 88.35,58.35 v88.35,62.08 | v87.58,57.58 88.35,58.35 | v37.02,54.24 37.73,54.94 v43.12,54.94 43.19,54.81 52.05,45.95 v52.05,30.46 | v75.25,27 v78.14,27 | v121.83,40.55 106.22,40.55 88.48,58.28 88.35,58.35
32KHZ  (via drill 0.3)
  Top 0.15: v86.49,48.26 86.49,46.91 R2-PINH1.1 | v88.35,57.58 88.35,58.67 88.61,58.93 U3.1 | v18,51.6 18,45.56 U2.9
  Bottom 0.15: 86.49,49.8 v86.49,48.26 | 86.49,49.8 88.35,51.67 v88.35,57.58 | v18,51.6 29.95,63.55 72.68,63.55 86.43,49.8 86.49,49.8
DN
  Top 0.15: J2.A7 163.72,54.56 164.23,54.56 164.49,54.3 164.49,53.79 164.3,53.59 163.72,53.59 J2.B7 163.66,53.53 163.14,53.53 158.64,49.03 154.79,49.03 D1.4
DP
  Top 0.15: 162.88,54.3 163.08,54.11 163.66,54.11 J2.A6 | 162.88,54.3 162.88,54.81 163.08,55.01 163.66,55.01 J2.B6 | D1.6 154.79,50.9 154.92,50.9 156.2,52.18 160.7,52.18 162.82,54.3 162.88,54.3
EPD_3V3  (via drill 0.3)
  Top 0.3: 76.95,27.41 78.27,26.1 78.72,26.1 Q2.2 | 76.95,27.41 76.66,27.7 76.34,27.7 C7.1 | 76.95,27.41 78.2,28.67 81.99,28.67 | 81.99,28.67 83.28,28.67 83.54,28.41 L1.2 | J1.16 84.43,14.14 84.88,14.14 J1.15 84.95,14.27 84.95,16.14 88.87,20.06 v88.87,20.18 88.87,21.79 EPD_C5.2 | v95.48,13.57 111.48,13.57 EPD_3V3.TP | v81.99,27.06 81.99,28.67
  Bottom 0.3: v95.48,13.57 v88.87,20.18 v81.99,27.06
EPD_3V3_C  (via drill 0.3)
  Top 0.3: v80.52,27.89 78.78,27.89 Q2.1 | v82.89,26.93 R_CL1.2 | v26.93,55.52 20.51,61.95 20.51,63.04 U2.18 | v61.56,45.69 v51.54,45.69 | v93.37,17.42 111.48,17.42 EPD_3V3_C.TP
  Bottom 0.3: v26.93,55.52 36.76,45.69 v51.54,45.69 | v61.56,45.69 61.69,45.69 79.42,27.96 80.39,27.96 v80.52,27.89 81.93,27.89 v82.89,26.93 83.02,26.87 92.47,17.42 v93.37,17.42
EPD_BUSY  (via drill 0.3)
  Top 0.15: v87.9,13.37 J1.9 | v105.32,3.09 111.87,3.09 EPD_BUSY.TP | v16.65,55.52 10.35,61.82 10.35,63.04 U2.26 | v83.28,11.83 83.47,11.83 83.79,11.51 v89.77,11.51
  Bottom 0.15: 89.77,13.37 95.04,13.37 v105.32,3.09 | 89.77,13.37 v87.9,13.37 | v16.65,55.52 16.65,44.73 19.22,42.16 37.4,42.16 51.41,28.15 51.41,28.09 67.67,11.83 v83.28,11.83 | 89.77,13.37 v89.77,11.51
EPD_CS  (via drill 0.3)
  Top 0.15: v86.36,15.24 86.36,14.21 J1.12 | v79.1,22.5 D6.2 | v75.38,26.29 74.54,26.29 R9.1 | v70.69,30.91 34.9,30.91 20.51,45.31 20.51,45.5 U2.11 | v93.37,14.79 111.93,14.79 123.63,3.09 124.91,3.09 EPD_CS.TP
  Bottom 0.15: v70.69,30.91 75.31,26.29 v75.38,26.29 79.1,22.56 v79.1,22.5 v86.36,15.24 86.43,15.24 86.88,14.79 v93.37,14.79
EPD_DC  (via drill 0.3)
  Top 0.15: v86.62,13.37 86.88,13.63 86.88,14.14 J1.11 | v89.12,10.87 113.03,10.87 120.8,3.09 EPD_DC.TP | v16.33,41.84 12.92,45.24 12.92,45.5 U2.5
  Bottom 0.15: v89.12,10.87 v86.62,13.37 86.56,13.37 84.56,11.38 63.23,11.38 32.78,41.84 v16.33,41.84
EPD_RST  (via drill 0.3)
  Top 0.15: v87.26,13.37 87.39,13.5 87.39,14.14 J1.10 | v90.22,10.42 108.66,10.42 115.98,3.09 EPD_RST.TP | v23.53,55.97 16.71,62.78 16.71,63.04 U2.21
  Bottom 0.15: v90.22,10.42 v87.26,13.37 87.26,13.44 85.91,14.79 85.91,15.11 85.66,15.37 83.28,15.37 71.65,27 71.65,27.06 43.31,55.39 37.79,55.39 37.21,55.97 v23.53,55.97
FLASH_CS
  Top 0.15: R5.1 35.03,48.71 36.63,48.71 D9.2 | U1.1 36.31,56.16 36.31,55.84 35.22,54.75 35.22,48.78 R5.1 | U2.12 21.79,45.56 21.79,45.82 24.62,48.65 34.96,48.65 R5.1
GDR
  Top 0.15: 68.44,15.04 67.92,15.56 Q3.1 | 68.44,15.04 68.89,14.6 71.65,14.6 71.78,14.72 71.78,15.62 72.1,15.94 72.93,15.94 75.7,13.18 83.02,13.18 83.92,12.28 89.9,12.28 91.37,13.76 91.37,14.14 J1.2 | 68.44,15.04 66.57,13.18 R4.1
GND  (via drill 0.3)
  Top 0.15: 51.47,100.62 52.24,100.62 C_DELAY.2 52.31,100.69 54.75,100.69 62.2,108.14 BOOT_BUTTON.1 62.27,108.21 65.74,108.21 BOOT_BUTTON.2 65.8,108.14 66.12,107.82 68.32,107.82 C6.2 | 51.47,100.62 50.32,100.62 49.74,100.05 47.94,100.05 IC1.3 | J4.G1 15.37,85.27 15.37,86.3 14.6,87.07 14.6,90.09 15.37,90.86 J4.G2 15.43,90.92 15.43,91.95 17.17,93.69 17.17,99.92 | 51.47,107.82 51.09,107.82 50.77,108.14 RESET_BUTTON.2 50.7,108.21 47.3,108.21 RESET_BUTTON.1 47.23,108.21 47.1,108.34 44.53,108.34 44.02,107.82 27.89,107.82 C10.2 27.83,107.82 26.1,107.82 25.77,108.14 CHANGE_BUTTON.2 25.71,108.21 22.31,108.21 CHANGE_BUTTON.1 22.24,108.21 22.11,108.34 17.55,108.34 17.17,107.95 17.17,99.92 | 51.47,107.82 52.82,107.82 C5.2 | v51.47,101.33 51.47,100.62 | 51.47,107.82 v51.47,107.24 | 37.34,46.08 37.79,46.53 37.79,50 36.38,51.41 36.38,52.37 U1.4 36.44,52.37 v37.02,52.95 | 37.34,46.08 35.16,46.08 34.32,46.91 34.32,47.81 34.45,47.94 35.99,47.94 36.63,47.3 D9.1 | 37.34,46.08 37.34,40.29 44.92,32.71 44.92,32.52 D12.1 44.98,32.46 49.03,32.46 D11.1 49.16,32.52 51.02,32.52 D10.1 51.09,32.52 68.12,32.52 84.82,49.23 U3.13 84.88,49.61 84.88,49.23 v85.85,48.26 | v38.05,53.98 38.37,54.3 40.23,54.3 U1.9 | U2.29_7 14.72,51.54 13.57,51.54 U2.29_4 13.5,51.6 13.5,52.76 U2.29_5 | U2.29_3 12.28,54.04 U2.29_6 | U2.29_5 13.5,52.82 13.5,53.98 U2.29_6 | U2.29_5 13.57,52.82 14.72,52.82 U2.29_8 14.79,52.82 14.92,52.95 v30.27,52.95 | U2.29_9 14.72,54.04 13.57,54.04 U2.29_6 | U2.29_3 12.28,53.98 12.28,52.82 U2.29_2 12.28,52.76 12.28,51.6 U2.29_1 12.22,51.54 11.12,51.54 7.85,48.26 7.85,45.56 U2.1
  Top 0.15: U2.29_3 12.22,54.11 7.85,58.48 7.85,63.04 U2.28 7.72,63.04 7.08,63.04 5.15,64.97 3.93,64.97 1.23,67.67 1.23,82.19 J4.G3 1.17,82.25 1.17,94.27 2.19,95.29 J4.G4 2.19,95.42 2.77,95.42 3.09,95.74 3.09,97.67 6.82,101.4 6.82,101.53 C9.2 6.88,101.59 7.46,102.17 11.64,102.17 13.89,99.92 | 13.89,99.92 13.89,98.83 13.7,98.63 12.6,98.63 11.9,99.34 11.7,99.34 D8.1 11.64,99.34 8.23,99.34 4.06,95.16 4.06,93.17 4.19,93.04 4.25,93.04 4.76,92.53 J4.P6 | v14.98,99.92 17.17,99.92 | v14.02,99.92 13.89,99.92 | J1.17 83.92,13.76 84.76,12.92 88.1,12.92 88.35,13.18 88.35,14.14 J1.8 88.42,14.21 88.42,19.09 89.64,20.31 89.64,22.37 | EPD_C10.1 81.93,23.14 EPD_C9.1 81.99,23.2 81.99,23.53 v82.38,23.91 | v83.28,23.91 83.28,23.59 83.66,23.2 EPD_C8.1 85.4,23.14 EPD_C7.1 85.46,23.14 87.13,23.14 EPD_C6.1 87.2,23.14 88.87,23.14 EPD_C5.1 88.93,23.08 89.64,22.37 | EPD_C2.2 90.73,23.14 92.21,23.14 EPD_C1.2 92.34,23.08 92.98,22.43 92.98,21.41 92.92,21.34 92.92,11.7 J1.MP1 92.85,11.96 83.79,11.96 83.47,12.28 80.13,12.28 79.49,11.64 J1.MP2 79.36,11.64 69.85,11.64 69.66,11.45 R2.1 69.59,11.38 68.24,10.03 66.77,10.03 | EPD_C2.2 90.73,23.2 90.34,23.59 90.34,28.73 D3.1 90.34,28.79 90.34,30.08 93.24,32.97 96.84,32.97 96.96,33.1 96.96,51.6 | 89.64,22.37 89.7,22.37 90.6,23.27 EPD_C2.2 | C7.2 76.34,26.42 76.34,23.78 76.79,23.33 D6.1 76.73,23.33 73,19.61 EPD_C11.1 72.93,19.61 71.65,19.61 EPD_C12.1 71.59,19.54 71.46,19.54 68.24,16.33 67.54,16.33 66,14.79 66,12.54 66.61,11.93 | GND_1.TP 59.95,2.39 63.81,2.39 GND.TP 63.87,2.45 63.87,7.08 66.77,9.97 66.77,10.03 | 66.61,11.93 65.93,11.25 65.93,11.06 SJ1.1 65.93,11 65.93,10.87 66.77,10.03
  Top 0.15: 66.61,11.93 66.77,12.09 66.83,12.09 R4.2 | J2.B12 163.72,51.22 163.72,50.96 J2.A1 163.72,50.9 163.72,49.74 164.23,49.23 J2.MP3 164.3,49.23 166.22,49.23 | 166.22,49.23 168.15,49.23 J2.MP1 | 166.22,59.44 164.3,59.44 J2.MP4 164.23,59.38 163.72,58.86 163.72,57.71 J2.A12 163.72,57.64 163.72,57.38 J2.B1 163.66,57.32 158.77,57.32 153.44,51.99 v153.44,50.9 153.05,50.51 153.05,50.45 152.6,50 152.28,50 D1.2 | 166.22,59.44 168.15,59.44 J2.MP2 | 166.22,59.44 166.22,49.23 | R2-USB1.1 153.5,46.08 153.5,47.3 R2-USB.2 153.44,47.36 153.44,49.1 152.6,49.93 D1.2 | D1.2 152.22,49.93 151.13,49.93 150.42,50.64 148.3,50.64 C5_USB.2 148.23,50.7 138.92,50.7 136.54,53.08 136.28,53.08 U4.6 136.16,53.08 135.51,53.08 135.32,53.27 U4.9 | v155.3,52.76 156.59,52.76 C4_USB.2 | R2_BAT.1 124.2,44.47 124.59,44.47 127.61,47.49 127.61,48.26 127.1,48.78 126.84,48.78 U5.2 126.78,48.9 126.45,48.9 125.94,49.42 125.94,51.41 127.06,52.53 | U4.4 134.29,52.63 134.61,52.63 135.26,53.27 U4.9 | U4.9 135.19,53.34 135.19,53.47 134.61,54.04 134.29,54.04 U4.1 134.23,54.11 133.33,55.01 128.51,55.01 C2_BAT.2 128.51,54.94 128.51,53.98 127.06,52.53 | C2.2 156.46,5.79 157.61,5.79 C1.2 157.61,5.86 158.32,6.56 158.32,7.53 156.72,9.13 156.65,9.13 | 156.65,9.13 156.07,9.13 155.62,9.58 155.62,9.84 SENSOR2.7 155.5,9.9 155.5,11 154.79,11.7 154.79,12.8 SENSOR2.1 154.72,12.86 154.72,14.47 130.82,38.37 C1_BAT2.2 130.82,38.43 129.15,38.43 127.61,36.89 C3.- 127.55,36.89 123.05,36.89 121.76,38.17 121.7,38.17 | 156.65,9.13 157.16,9.65 157.16,9.84 SENSOR2.5 157.23,9.9 165.13,17.81 J3.1 | 92.5,53.56 94.39,51.67 C10_SUPERCAP.1 94.46,51.6 96.96,51.6
  Top 0.15: 92.5,53.56 92.34,53.72 92.34,58.99 C8.2 | v92.47,53.53 92.5,53.56 | 121.7,38.17 120.03,36.5 119.19,36.5 C1_BAT1.2 119.13,36.44 118.42,35.73 117.46,35.73 116.05,37.15 116.05,39.01 R1_PWRUSB.1 115.98,39.14 115.34,39.78 115.34,40.81 116.24,41.71 116.24,49.55 C1_BAT.2 116.17,49.55 114.12,51.6 | 121.7,38.17 121.7,38.95 121.19,39.46 121.06,39.46 IC4.2 | 114.12,51.6 96.96,51.6 | 127.06,52.53 125.62,53.98 125.62,64.65 124.85,65.42 123.88,65.42 114.12,55.65 114.12,51.6
  Bottom 0.15: v51.47,107.24 v51.47,101.33 | v38.05,53.98 v37.02,52.95 v30.27,52.95 | v14.02,99.92 v14.98,99.92 | v83.28,23.91 v82.38,23.91 | v153.44,50.9 v155.3,52.76 | v85.85,48.26 86.3,47.81 86.75,47.81 v92.47,53.53
  pour Bottom: 77.02,10.02 77.04,10.04 95.29,10.04 95.31,10.02 95.33,10 95.35,9.98 95.35,0.08 170.13,0.08 170.13,67.13 92.19,67.13 92.17,67.15 92.15,67.17 92.13,67.19 92.13,111.13 68.34,111.13 68.34,110.44 68.32,110.42 68.3,110.4 68.28,110.38 19.82,110.38 19.8,110.4 19.78,110.42 19.76,110.44 19.76,111.13 0.09,111.13 0.09,63.46 6.32,63.46 6.34,63.44 6.36,63.42 6.38,63.4 6.38,45.22 6.36,45.2 6.34,45.18 6.32,45.16 0.09,45.16 0.09,0.09 76.98,0.09 76.98,9.98 77,10
  pour Top: 77.02,10.02 77.04,10.04 95.29,10.04 95.31,10.02 95.33,10 95.35,9.98 95.35,0.08 170.13,0.08 170.13,67.13 92.19,67.13 92.17,67.15 92.15,67.17 92.13,67.19 92.13,111.13 68.34,111.13 68.34,110.44 68.32,110.42 68.3,110.4 68.28,110.38 19.82,110.38 19.8,110.4 19.78,110.42 19.76,110.44 19.76,111.13 0.09,111.13 0.09,63.46 6.32,63.46 6.34,63.44 6.36,63.42 6.38,63.4 6.38,45.22 6.36,45.2 6.34,45.18 6.32,45.16 0.09,45.16 0.09,0.09 76.98,0.09 76.98,9.98 77,10
GPIO8
  Top 0.15: R1.2 19.22,42.67 19.22,45.5 U2.10
I2C_PW  (via drill 0.3)
  Top 0.15: C1.1 157.61,7.08 156.46,7.08 C2.1 156.39,7.08 155.24,7.08 R1_PINH.2 | R2-PINH.2 154.02,7.08 155.17,7.08 R1_PINH.2 | R1_PINH.2 154.79,7.14 154.79,9.84 SENSOR2.8 154.79,9.9 v154.79,11.06 | SENSOR2.6 156.33,9.9 156.33,11.77 155.62,12.47 155.62,12.8 SENSOR2.2 155.56,12.86 155.56,13.05 155.17,13.44 v155.17,13.7 | v28.15,56.42 21.79,62.78 21.79,63.04 U2.17
  Bottom 0.15: v28.15,56.42 37.21,56.42 37.92,55.71 52.18,55.71 79.55,28.34 140.52,28.34 v155.17,13.7 155.17,13.63 154.79,13.25 v154.79,11.06
INT_RTC  (via drill 0.3)
  Top 0.15: 90.8,72.03 90.8,72.74 89.57,73.96 INT_RTC.TP | 90.8,72.03 90.8,67.92 92.98,65.74 92.98,59.89 92.85,59.76 91.95,59.76 91.63,59.44 91.63,58.61 91.82,58.41 91.82,50.9 R1_PINH1.1 | v17.62,44.41 16.71,45.31 16.71,45.5 U2.8 | v51.54,44.41 71.91,44.41 86.11,58.61 86.11,58.93 U3.3 86.11,58.99 85.72,59.38 85.72,68.69 89.06,72.03 90.8,72.03
  Bottom 0.15: v51.54,44.41 v17.62,44.41
IO/BOOT  (via drill 0.3)
  Top 0.15: C6.1 68.32,109.11 66.32,109.11 65.8,109.62 BOOT_BUTTON.3 65.74,109.69 62.33,109.69 BOOT_BUTTON.4 62.2,109.62 61.69,109.11 60.02,109.11 R_BOOT.2 59.89,109.04 v59.25,108.4 | v24.36,73.51 24.36,63.1 U2.15
  Bottom 0.15: v59.25,108.4 v24.36,73.51
IO/CHANGE
  Top 0.15: C10.1 27.83,109.11 26.29,109.11 25.77,109.62 CHANGE_BUTTON.3 25.71,109.69 22.31,109.69 CHANGE_BUTTON.4 22.24,109.62 21.73,109.11 20.38,109.11 R_CHANGE.2 20.31,109.04 17.81,109.04 14.53,105.77 14.53,99.02 14.14,98.63 14.14,63.1 U2.23
MISO  (via drill 0.3)
  Top 0.15: v45.82,29.44 45.18,28.79 R8.1 | v45.82,33.1 44.98,33.93 D12.2 44.92,34 43.7,35.22 43.7,44.53 37.6,50.64 37.6,54.3 36.95,54.94 | 36.95,54.94 36.38,54.94 U1.2 | 37.05,56.52 37.08,56.49 37.08,55.14 36.95,55.01 36.95,54.94 | 37.05,56.52 36.89,56.68 35.86,56.68 34.25,55.07 16.46,55.07 9.07,62.46 9.07,63.04 U2.27 9,63.1 9,63.36 7.08,65.29 4.06,65.29 1.62,67.73 1.62,72.29 6.82,77.5 6.82,91.95 5.21,93.56 5.02,93.56 J4.P7 | v44.73,63.1 81.09,99.47 81.09,101.59 MISO.TP | v38.17,56.55 37.08,56.55 37.05,56.52
  Bottom 0.15: v45.82,33.1 v45.82,29.44 | v38.17,56.55 v44.73,63.1
MOSI  (via drill 0.3)
  Top 0.15: v85.46,14.92 85.46,14.21 J1.14 | v53.59,27.19 51.09,27.19 49.35,28.92 R7.1 | 44.21,43.96 44.21,38.88 49.1,34 D11.2 49.16,33.93 49.8,33.29 51.54,33.29 51.86,32.97 v52.57,32.97 | 44.21,43.96 44.21,52.37 U1.5 44.28,52.37 v45.63,53.72 | v18.77,43.96 16.78,43.96 15.43,45.31 15.43,45.5 U2.7 15.43,45.63 15.43,45.76 v14.02,47.17 | v44.15,43.96 44.21,43.96 | v6.37,77.69 6.37,88.55 5.73,89.19 5.02,89.19 J4.P3 | v46.85,54.94 88.16,96.26 88.16,101.59 MOSI.TP
  Bottom 0.15: v85.46,14.92 65.87,14.92 v53.59,27.19 53.59,31.94 v52.57,32.97 | v44.15,43.96 v18.77,43.96 | v6.37,77.69 6.37,65.09 9.9,61.56 9.9,49.93 12.67,47.17 v14.02,47.17 | v45.63,53.72 v46.85,54.94
N$1
  Top 0.15: R2-USB.1 154.79,47.36 154.79,47.75 153.89,48.65 153.89,51.99 157.94,56.04 163.66,56.04 J2.B5
N$2
  Top 0.15: R2-USB1.2 154.85,46.08 156.14,46.08 163.08,53.02 163.66,53.02 J2.A5
N$3
  Top 0.15: C1_BAT1.1 117.84,36.5 117.84,38.5 117.78,38.56 D2.1 117.91,38.5 119.58,38.5 120.22,39.14 120.29,39.14 | 120.29,39.14 120.86,38.56 IC4.3 | 120.29,39.14 120.29,39.84 120.86,40.42 120.99,40.42 IC4.1 121.06,40.49 121.64,41.07 127.93,41.07 132.11,45.24 132.88,45.24 Q1.2
N$4
  Top 0.15: C4.1 96.26,32.26 93.88,32.26 D4.1 93.82,32.26 93.82,28.79 D3.2
N$5
  Top 0.15: CHG_LED.C 120.86,49.61 122.09,48.39 R1_BAT.2
N$6
  Top 0.15: R1_BAT.1 120.86,48.33 121.06,48.33 121.76,47.62 122.73,47.62 123.5,48.39 126.07,48.39 126.52,47.94 126.78,47.94 U5.1
N$7
  Top 0.15: J1.22 81.35,14.21 81.35,20.76 80.32,21.79 EPD_C10.2
N$8
  Top 0.15: R2_BAT.2 124.2,45.76 U5.5
N$9
  Top 0.15: IC1.5 50.77,101.91 52.24,101.91 C_DELAY.1
N$10
  Top 0.15: J1.4 90.47,14.21 90.47,19.99 92.27,21.79 EPD_C1.1
N$11
  Top 0.15: J1.5 89.96,14.21 89.96,21.08 90.67,21.79 EPD_C2.1
N$12
  Top 0.15: R_CAPACITOR.2 88.03,61.24 86.36,62.91 D7.1
N$19
  Top 0.15: J1.18 83.47,14.21 83.47,18.06 87.13,21.73 EPD_C6.2
N$20
  Top 0.15: J1.19 82.96,14.21 82.96,19.29 85.4,21.73 EPD_C7.2
N$21
  Top 0.15: J1.20 82.44,14.21 82.44,20.57 83.66,21.79 EPD_C8.2
N$25
  Top 0.15: J1.24 80.39,14.21 75.7,14.21 71.65,18.26 EPD_C12.2
PREVGH
  Top 0.15: J1.21 81.93,14.21 81.93,21.86 EPD_C9.2 81.99,21.92 82.83,22.75 82.83,24.1 86.43,27.7 86.43,33.55 85.33,34.64 85.33,35.41 D5.1
PREVGL
  Top 0.15: 77.17,18.26 80.9,14.53 80.9,14.21 J1.23 | 77.17,18.26 73,18.26 EPD_C11.2 | D4.2 90.28,32.33 89.77,32.33 85.98,36.12 83.79,36.12 81.35,33.68 80.84,33.68 75.63,28.47 75.63,27.25 75.89,27 76.85,27 77.56,26.29 77.56,18.71 77.17,18.32 77.17,18.26
RESE
  Top 0.15: J1.3 90.86,14.14 90.86,13.76 89.7,12.6 84.05,12.6 83.15,13.5 75.83,13.5 73.06,16.27 71.97,16.27 71.26,15.56 71.26,15.3 R3.1 71.2,15.56 69.21,15.56 Q3.2
RESE'
  Top 0.15: SJ1.2 67.47,11.06 69.08,12.67 69.59,12.67 R2.2 69.66,12.73 70.23,12.73 72.48,14.98 72.48,15.24 R3.2
RESET  (via drill 0.3)
  Top 0.15: R_RESET.2 45.11,109.11 46.72,109.11 47.23,109.62 RESET_BUTTON.4 47.3,109.69 50.7,109.69 RESET_BUTTON.3 50.77,109.62 52.31,109.62 52.82,109.11 C5.1 52.89,109.04 53.53,108.4 53.53,107.31 48.68,102.46 | 48.68,102.46 48.13,101.91 IC1.1 | v10.35,50.12 10.35,45.56 U2.3 | v48.71,102.43 48.68,102.46
  Bottom 0.15: v10.35,50.12 10.35,64.07 v48.71,102.43
RTC_RST
  Top 0.15: U2.16 23.08,63.04 23.08,62.78 28.86,57 41.71,57 42.67,56.04 42.67,54.75 42.93,54.49 80.71,54.49 84.82,58.61 84.82,58.93 U3.4
RX
  Top 0.15: U2.24 12.86,63.1 12.86,63.3 4.38,71.78 2.9,71.78 RX.TP
SCK  (via drill 0.3)
  Top 0.15: 46.3,53.69 51.02,48.97 51.02,34.06 D10.2 50.96,34.06 50.45,34.06 v50.12,33.74 | 46.3,53.69 45.82,54.17 45.43,54.17 44.98,53.72 44.21,53.72 U1.6 | v46.33,55.27 84.63,93.56 84.63,101.59 SCK.TP | v46.33,53.72 46.3,53.69 | v85.53,13.37 85.85,13.7 85.85,14.14 J1.13 | v51.86,28.28 51.22,28.92 R6.1 | v18.77,43.31 16.14,43.31 14.14,45.31 14.14,45.5 U2.6 14.14,45.63 14.14,45.82 13.25,46.72 v12.67,46.72 | v5.92,90.6 5.15,91.37 5.02,91.37 J4.P5
  Bottom 0.15: v46.33,55.27 46.53,55.27 46.66,55.39 47.04,55.39 47.3,55.14 47.3,54.69 v46.33,53.72 | v85.53,13.37 66.77,13.37 v51.86,28.28 51.79,28.28 48.23,31.85 | v18.77,43.31 36.76,43.31 48.23,31.85 | v5.92,90.6 5.92,65.09 9.58,61.43 9.58,49.8 v12.67,46.72 | 48.23,31.85 v50.12,33.74
SCL  (via drill 0.3)
  Top 0.15: v139.11,51.15 136.73,53.53 136.22,53.53 U4.7 | v139.11,47.04 165.32,20.83 J3.4 165.39,20.76 165.65,20.76 166.55,19.86 166.55,12.99 161.76,8.2 | 161.76,8.2 158.45,4.89 154.98,4.89 154.15,5.73 154.02,5.73 R2-PINH.1 | v158.32,11.64 SENSOR2.4 | v161.79,8.17 161.76,8.2 | v23.91,56.87 18,62.78 18,63.04 U2.20 | v88.03,48.45 88.03,49.03 88.61,49.61 U3.16
  Bottom 0.15: v139.11,51.15 v139.11,47.04 128.96,47.04 122.02,40.1 96.45,40.1 88.1,48.45 v88.03,48.45 87.07,47.49 85.98,47.49 77.43,56.04 38.05,56.04 37.21,56.87 v23.91,56.87 | v161.79,8.17 v158.32,11.64
SDA  (via drill 0.3)
  Top 0.15: v139.75,51.15 136.86,54.04 136.22,54.04 U4.8 | v139.75,45.11 165,19.86 165.32,19.86 J3.3 165.39,19.8 165.65,19.8 166.22,19.22 166.22,13.25 160.92,7.94 | 160.92,7.94 158.19,5.21 155.88,5.21 155.37,5.73 155.24,5.73 R1_PINH.1 | v157.74,11.12 156.39,12.47 156.39,12.8 SENSOR2.3 | v160.89,7.98 160.92,7.94 | v20.12,64.2 19.22,63.3 19.22,63.1 U2.19 | v87.13,51.09 87.13,49.93 87.39,49.67 U3.15
  Bottom 0.15: v139.75,45.11 v139.75,51.15 139.75,51.22 128.45,62.52 88.1,62.52 81.9,56.32 | v160.89,7.98 v157.74,11.12 | v20.12,64.2 74.03,64.2 81.9,56.32 | v87.13,51.09 81.9,56.32
SRC  (via drill 0.3)
  Top 0.15: C4.2 96.26,33.61 88.93,33.61 86.11,36.44 82.83,36.44 81.87,35.48 D5.2 81.8,35.41 76.79,30.4 v76.21,30.4 | v72.1,27.19 68.57,23.65 68.57,17.74 Q3.3 | v77.17,29.37 80.71,32.91 83.54,32.91 L1.1
  Bottom 0.15: v72.1,27.19 72.1,28.86 70.23,30.72 70.23,31.11 70.49,31.36 75.25,31.36 v76.21,30.4 76.21,30.34 v77.17,29.37
SS_SD  (via drill 0.3)
  Top 0.15: D8.2 13.12,99.41 12.28,100.24 8.94,100.24 R10.1 8.88,100.24 8.49,100.24 v5.47,97.22 | v11.57,47.17 11.57,45.56 U2.4 | v5.47,86.04 5.98,86.56 5.98,87.58 5.47,88.1 J4.P2
  Bottom 0.15: v11.57,47.17 11.57,47.36 6.63,52.31 6.63,63.94 5.47,65.09 v5.47,86.04 v5.47,97.22
TX
  Top 0.15: U2.25 11.57,63.1 11.57,63.36 6.76,68.18 2.9,68.18 TX.TP
USB_D+  (via drill 0.3)
  Top 0.15: v150.8,50.9 152.22,50.9 D1.1 | v72.42,36.18 72.23,36.18 67.79,31.75 38.11,31.75 24.36,45.5 U2.14
  Bottom 0.15: v150.8,50.9 146.18,50.9 131.47,36.18 v72.42,36.18
USB_D-  (via drill 0.3)
  Top 0.15: v149.13,48.97 152.22,48.97 D1.3 | v72.81,35.73 72.23,35.73 67.92,31.43 36.89,31.43 23.08,45.24 23.08,45.5 U2.13
  Bottom 0.15: v149.13,48.97 144.7,48.97 131.47,35.73 v72.81,35.73
VBAT  (via drill 0.3)
  Top 0.3: VBAT.TP 127.61,64.2 127.16,63.75 127.16,55.07 C2_BAT.1 127.1,54.88 v127.1,53.21 | U4.2 134.29,53.53 134.29,53.08 U4.3 134.1,53.08 133.84,53.08 131.98,51.22 131.98,47.55 Q1.3 131.91,47.43 129.47,47.43 127.16,49.74 126.84,49.74 U5.3 127.1,49.87 v127.1,50.45
  Bottom 0.3: v127.1,50.45 v127.1,53.21
VBUS  (via drill 0.3)
  Top 0.3: 118.62,49.61 119.58,49.61 120.29,50.32 121.64,50.32 122.21,49.74 CHG_LED.A 122.34,49.67 124.08,49.67 124.14,49.74 U5.4 124.33,49.8 124.33,64.13 VBUS.TP | 118.62,49.61 117.65,49.61 C1_BAT.1 | 155.66,50.48 155.11,49.93 154.79,49.93 D1.5 | 155.66,50.48 156.59,51.41 C4_USB.1 | 148.3,47.55 148.3,45.56 150.42,43.44 PFMF.050.1.2 | 148.3,47.55 148.3,49.35 C5_USB.1 148.43,49.42 v149.01,50 | v155.75,50.38 155.66,50.48 | R1_PWRUSB.2 116.05,40.42 117.52,40.42 117.72,40.62 D2.2 117.84,40.74 118.55,41.45 118.62,41.45 | 118.62,41.45 122.47,41.45 126.26,45.24 130.95,45.24 Q1.1 131.08,45.24 133.39,47.55 148.3,47.55 | 118.62,41.45 118.62,49.61
  Bottom 0.3: v155.75,50.38 149.39,50.38 v149.01,50
VRTC
  Top 0.15: 87.42,60.57 86.81,61.18 R_CAPACITOR.1 | 87.42,60.57 87.65,60.34 92.27,60.34 C8.1 | C10_SUPERCAP.2 94.39,49.42 92.85,49.42 91.44,48 87.45,48 86.17,49.29 86.17,49.61 U3.14 86.17,49.67 86.68,50.19 86.68,59.83 87.42,60.57
VUSB
  Top 0.3: J2.A9 163.72,56.81 163.72,56.61 J2.B4 163.85,56.55 164.36,56.55 164.88,56.04 164.88,52.57 164.43,52.12 163.85,52.12 J2.B9 163.72,52.05 163.72,51.79 J2.A4 163.59,51.73 163.01,51.73 154.98,43.7 154.98,43.44 PFMF.050.1.1
(copper drawn outside any net)
  shapes: Top area x3